# Altium PCB PCB1.PcbDoc
Units mm, origin at the board's own origin, x right, y up, seen from the top; angles counter-clockwise.
Board outline 100 x 100 mm, 2 copper layers (Top Layer, Bottom Layer); 4 components, 38 nets, 80 pads, 0 vias.
Unrouted connection lines stored in the file: 42.
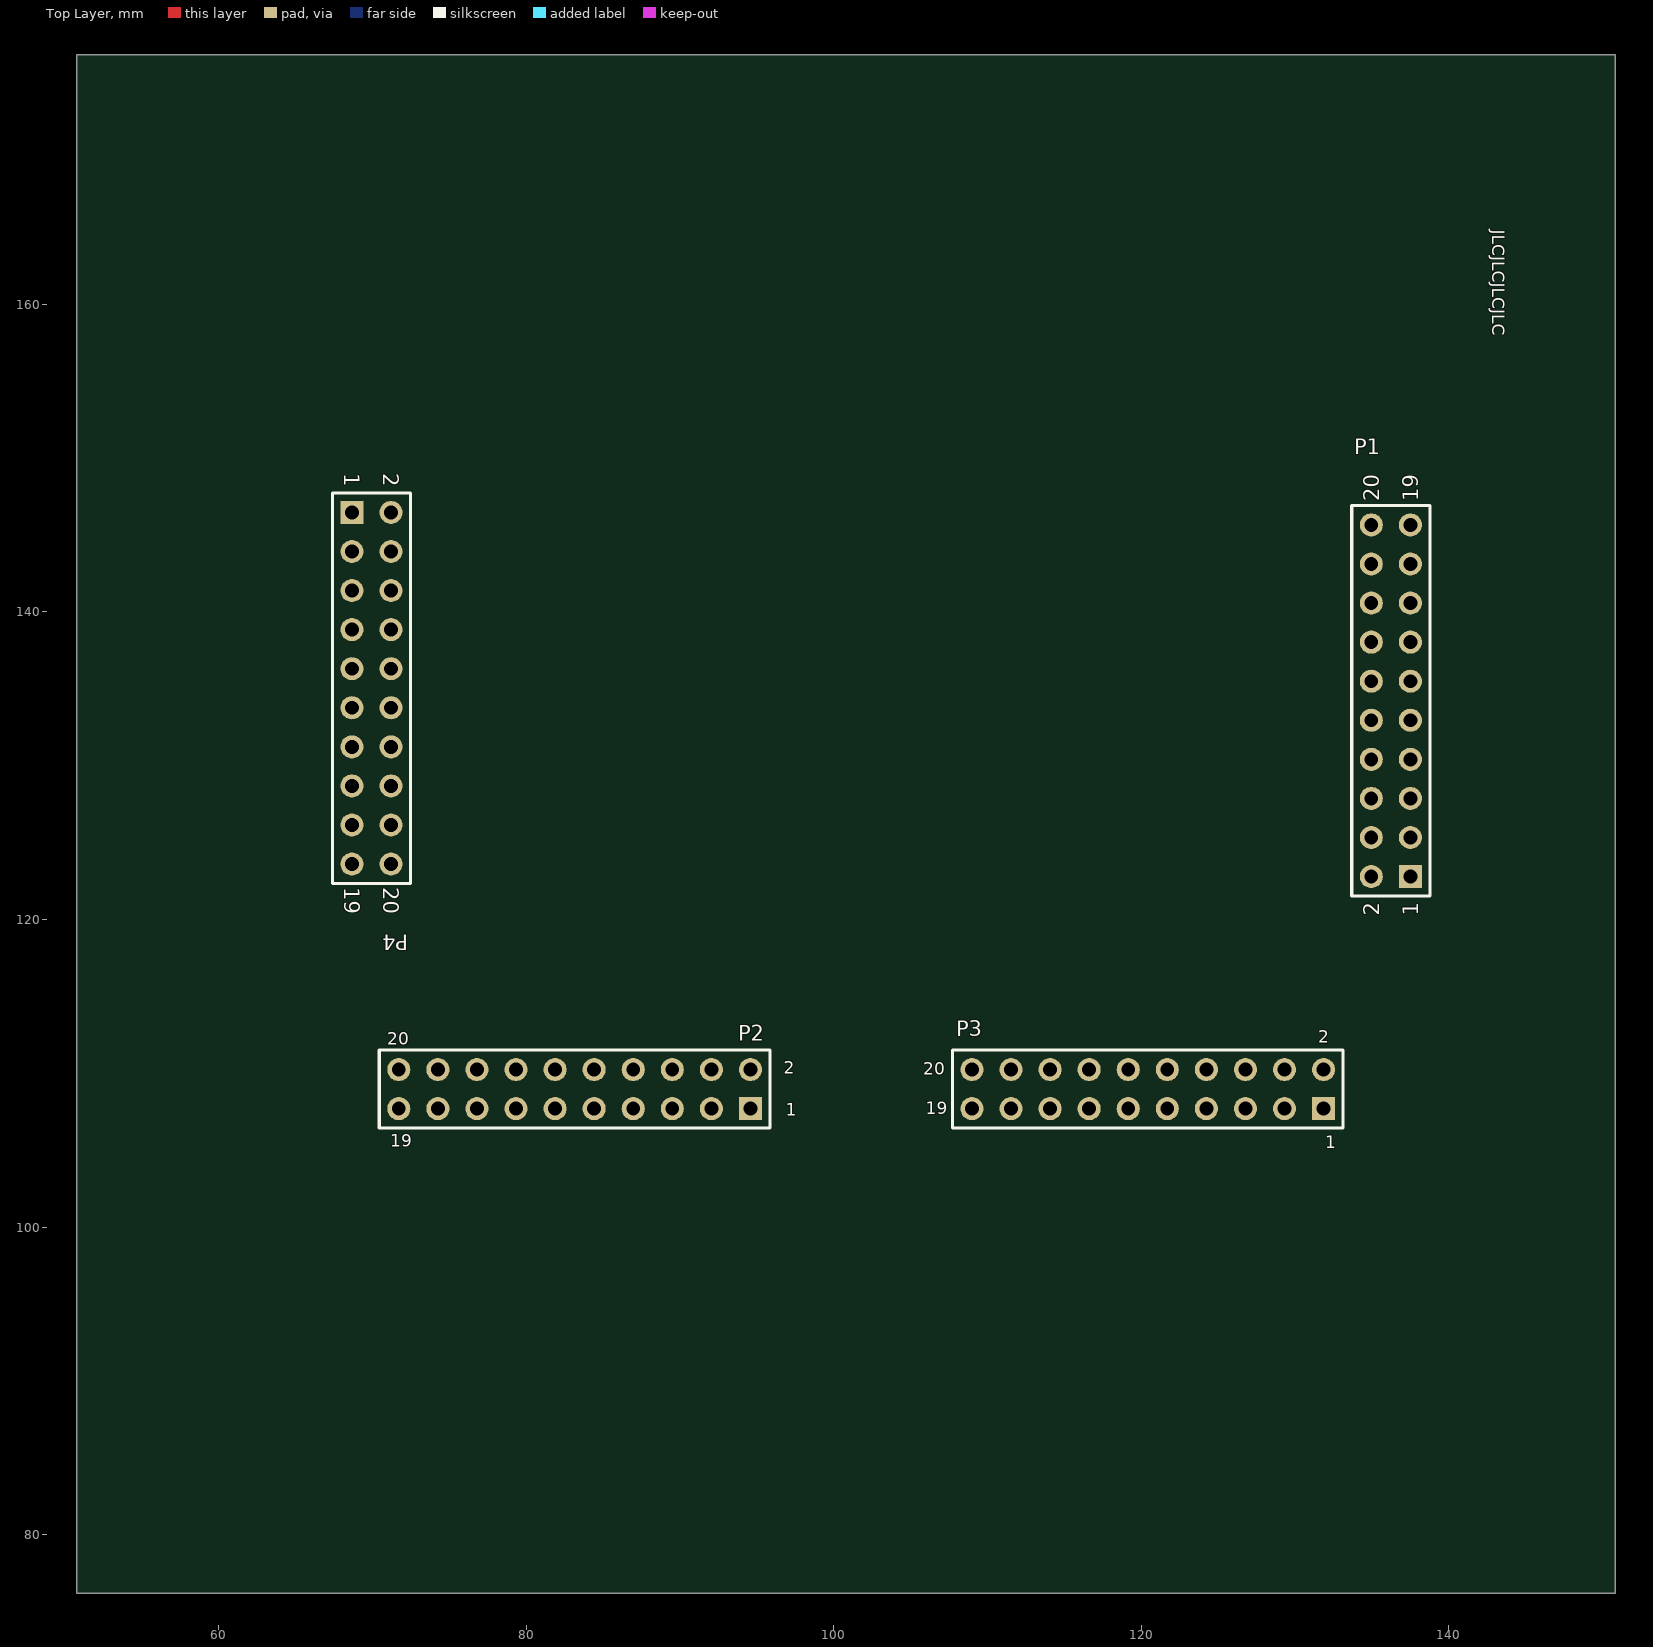
[diagram p0: Top Layer view]
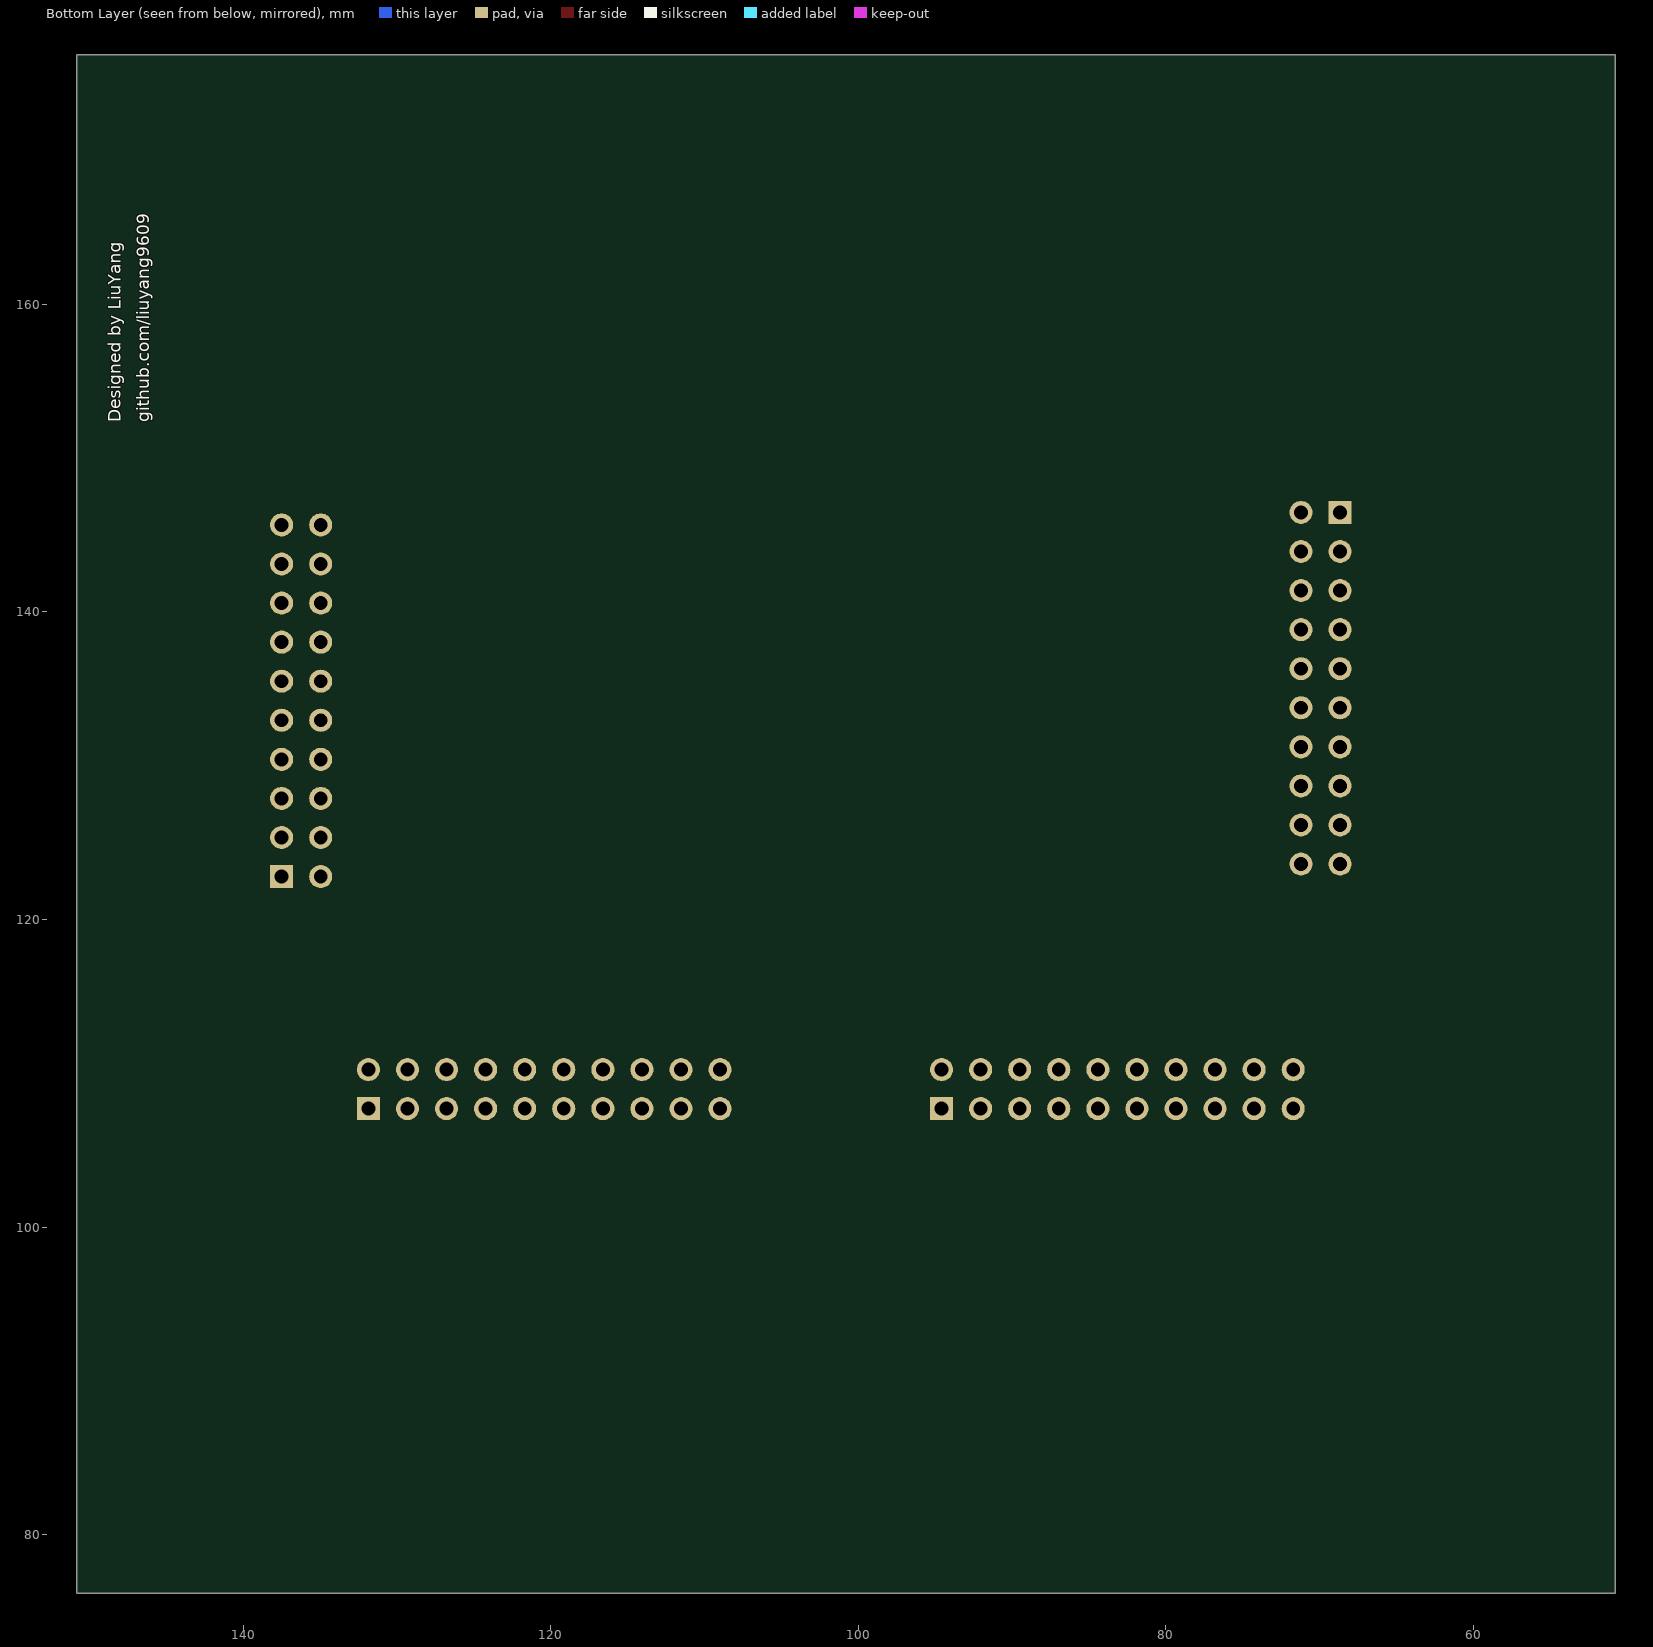
[diagram p1: Bottom Layer view, seen from below]

## Layer stack, top to bottom
Top Solder: solder mask 0.0102, Solder Resist, Dk 3.5
Top Layer: signal copper 0.0356
Dielectric 1: dielectric 0.32, FR-4, Dk 4.8
Bottom Layer: signal copper 0.0356
Bottom Solder: solder mask 0.0102, Solder Resist, Dk 3.5

## Board outline
50.8,76.2 150.8,76.2 150.8,176.2 50.8,176.2

## Design rules (kind name [scope] priority, off if disabled: settings)
Clearance [All] p1: gap=0.2
PolygonConnect [All] p1: connectstyle=Relief reliefconductorwidth=0.254 reliefentries=4 polygonreliefangle="90 Angle" airgapwidth=0.254
RoutingVias [All] p1: holewidth=0.6 width=1 viastyle="Through Hole" minholewidth=0.711 minwidth=1.27 maxholewidth=0.711 maxwidth=1.27
SolderMaskExpansion [All] p1: expansion=0.102
Width [All] p1: maxlimit=0.2 minlimit=0.2 preferedwidth=0.2
30 further rules are at their usual default settings.

## Components (designator, comment, footprint, x,y, rotation, side; value= is the part's Value field where it differs from the comment)
P1 "Header 10X2" HDR2X10#1 137.49,122.784 r90 top
P2 "Header 10X2" HDR2X10#2 94.588,107.694 r180 top
P3 "Header 10X2" HDR2X10#2 131.848,107.694 r180 top
P4 "Header 10X2" HDR2X10#1 68.682,146.456 r270 top

## Footprints (in the part's own frame and the unit in brackets; to place one, negate y for a bottom-side part, rotate by r counter-clockwise, add the part's x,y. Pads: shape width x height; smd on the part's side, far side on the other; paste and mask are expansions set on the pad)
HDR2X10#1 [mm] "Connector; Header; 10x2 Position"
  rect 1.5x1.5 hole 0.9: 1(0,0)
  round 1.5 hole 0.9: 2(0,2.54) 3(2.54,0) 4(2.54,2.54) 5(5.08,0) 6(5.08,2.54) 7(7.62,0) 8(7.62,2.54) 9(10.16,0) 10(10.16,2.54) 11(12.7,0) 12(12.7,2.54) 13(15.24,0) 14(15.24,2.54) 15(17.78,0) 16(17.78,2.54) 17(20.32,0) 18(20.32,2.54) 19(22.86,0) 20(22.86,2.54)
  silkscreen extent -1.27,-1.27 24.13,3.81
HDR2X10#2 [mm] "Connector; Header; 10x2 Position"
  rect 1.5x1.5 hole 0.9: 1(0,0)
  round 1.5 hole 0.9: 2(0,-2.54) 3(2.54,0) 4(2.54,-2.54) 5(5.08,0) 6(5.08,-2.54) 7(7.62,0) 8(7.62,-2.54) 9(10.16,0) 10(10.16,-2.54) 11(12.7,0) 12(12.7,-2.54) 13(15.24,0) 14(15.24,-2.54) 15(17.78,0) 16(17.78,-2.54) 17(20.32,0) 18(20.32,-2.54) 19(22.86,0) 20(22.86,-2.54)
  silkscreen extent -1.27,-3.81 24.13,1.27

## Part data
P1 P2 P3 P4: "Header, 10-Pin, Dual row"

## Nets (pads, with @x,y where several pads share a name; then routed paths per layer and width w, separated by ;. In a path a pad name is that pad's centre, name@x,y a point inside that pad or via, vN(x,y) a via of type N, cw(c..) or ccw(c..) an arc to the next point about the centre after c; other vN are vias at no path point)
LEFT_D0: P1.16 P3.16
LEFT_D1: P1.15 P3.15
LEFT_D2: P1.14 P3.14
LEFT_D3: P1.13 P3.13
LEFT_D4: P1.12 P3.12
LEFT_D5: P1.11 P3.11
LEFT_D6: P1.10 P3.10
LEFT_D7: P1.9 P3.9
LEFT_GND: P1.2 P1.17 P3.2 P3.17
LEFT_HREF: P1.6 P3.6
LEFT_NC1: P1.18 P3.18
LEFT_NC2: P1.19 P3.19
LEFT_NC3: P1.20 P3.20
LEFT_PCLK: P1.7 P3.7
LEFT_SCL: P1.3 P3.3
LEFT_SDA: P1.4 P3.4
LEFT_SYNC: P1.5 P3.5
LEFT_VCC: P1.1 P3.1
LEFT_XCLK: P1.8 P3.8
RIGHT_D0: P2.16 P4.16
RIGHT_D1: P2.15 P4.15
RIGHT_D2: P2.14 P4.14
RIGHT_D3: P2.13 P4.13
RIGHT_D4: P2.12 P4.12
RIGHT_D5: P2.11 P4.11
RIGHT_D6: P2.10 P4.10
RIGHT_D7: P2.9 P4.9
RIGHT_GND: P2.2 P2.17 P4.2 P4.17
RIGHT_HREF: P2.6 P4.6
RIGHT_NC1: P2.18 P4.18
RIGHT_NC2: P2.19 P4.19
RIGHT_NC3: P2.20 P4.20
RIGHT_PCLK: P2.7 P4.7
RIGHT_SCL: P2.3 P4.3
RIGHT_SDA: P2.4 P4.4
RIGHT_SYNC: P2.5 P4.5
RIGHT_VCC: P2.1 P4.1
RIGHT_XCLK: P2.8 P4.8

## Silkscreen, mask and mechanical layers (free items; w line width, h text height)
Top Overlay:
  text "JLCJLCJLCJLC" at 142.824,164.846 h0.8 r270
Bottom Overlay:
  text "github.com/liuyang9609" at 146.1,152.321 h0.8 r270
  text "Designed by LiuYang" at 147.954,152.321 h0.8 r270

## Text inside footprints (layer, text, board x,y; h text height)
P1: Top Overlay "2" at 135.458,120.244 h1 r90; Top Overlay "1" at 137.998,120.244 h1 r90; Top Overlay "19" at 137.998,147.168 h1 r90; Top Overlay "20" at 135.458,147.168 h1 r90
P2: Top Overlay "2" at 96.759,109.959 h0.8; Top Overlay "1" at 96.886,107.241 h0.8; Top Overlay "19" at 71.163,105.219 h0.8; Top Overlay "20" at 70.963,111.844 h0.8
P3: Top Overlay "2" at 131.488,111.994 h0.8; Top Overlay "1" at 131.963,105.119 h0.8; Top Overlay "19" at 105.979,107.343 h0.8; Top Overlay "20" at 105.826,109.883 h0.8
P4: Top Overlay "2" at 70.714,148.996 h1 r270; Top Overlay "1" at 68.174,148.996 h1 r270; Top Overlay "19" at 68.174,122.072 h1 r270; Top Overlay "20" at 70.714,122.072 h1 r270